# EAGLE board eeruler (EAGLE 6.6.0)

Size 200 x 32 mm. Coordinates in mm from the lower left corner, seen from the top.
Outline: 200,0 200,32 0,32 0,0 200,0
Copper layers 1: Top 0.035mm
Design rules "default *": minimum track width 5mil, minimum drill 0.25mm, track to track 0mil, track to pad 0mil, pad to pad 0mil, via to via 0mil, smd to smd 0mil, copper to edge 0mil, drill to drill 8mil, minimum pad ring 10mil, minimum via ring 8mil, stop-mask expansion 2mil, vias tented up to drill 0mil, thermal gap 10mil
Holes 0.4 mm at 1.5,6
Holes 0.5 mm at 1.5,8.1
Holes 0.6 mm at 1.5,10.2
Holes 0.7 mm at 1.5,12.3
Holes 0.8 mm at 1.5,14.4
Holes 0.9 mm at 1.5,16.5
Holes 1 mm at 1.5,18.6
Holes 1.1 mm at 1.5,20.6
Holes 1.2 mm at 1.5,22.8
Holes 1.3 mm at 1.5,24.9
Holes 1.4 mm at 1.5,27
Holes 1.5 mm at 197.5,5
Holes 1.8 mm at 197.5,14
Holes 1.7 mm at 197.5,11
Holes 1.6 mm at 197.5,8
Holes 1.9 mm at 197.5,17
Holes 2 mm at 197.5,20
Holes 2.2 mm at 197.5,23
Holes 3.2 mm at 197.5,26.5
Holes 0.3 mm at 1.5,4

## Footprints (pad centres in the part's own frame; a part is rotated, then mirrored left to right if it is on the bottom)
COPPER-0,15 = smd 6 x 0.15: P$1 3,0.3; P$2 3,0; P$3 3,-0.3
COPPER-0,2 = smd 6 x 0.2: P$1 3,0.4; P$2 3,0; P$3 3,-0.4
COPPER-0,3 = smd 6 x 0.3: P$1 3,0.6; P$2 3,0; P$3 3,-0.6
COPPER-0,4 = smd 6 x 0.4: P$1 3,0.8; P$2 3,0; P$3 3,-0.8
COPPER-0,5 = smd 6 x 0.5: P$1 3,1; P$2 3,0; P$3 3,-1
PINCOUNT-0,5 = smd 3 x 0.25: P$1 1.5,-4.125; P$2 1.5,-3.625; P$3 1.5,-3.125; P$4 1.5,-2.625; P$5 1.5,-2.125; P$6 1.5,-1.625; P$7 1.5,-1.125; P$8 1.5,-0.125; P$9 1.5,-0.625; P$10 1.5,-8.625; P$11 1.5,-8.125; P$12 1.5,-7.625; P$13 1.5,-7.125; P$14 1.5,-6.625; P$15 1.5,-6.125; P$16 1.5,-5.625; P$17 1.5,-4.625; P$18 1.5,-5.125; P$19 1.5,-9.125; P$20 1.5,-13.625; P$21 1.5,-13.125; P$22 1.5,-12.625; P$23 1.5,-12.125; P$24 1.5,-11.625; P$25 1.5,-11.125; P$26 1.5,-10.625; P$27 1.5,-9.625; P$28 1.5,-10.125; P$29 1.5,-14.125; P$30 1.5,-18.625; P$31 1.5,-18.125; P$32 1.5,-17.625; P$33 1.5,-17.125; P$34 1.5,-16.625; P$35 1.5,-16.125; P$36 1.5,-15.625; P$37 1.5,-14.625; P$38 1.5,-15.125; P$39 1.5,-19.125; P$40 1.5,-23.625; P$41 1.5,-23.125; P$42 1.5,-22.625; P$43 1.5,-22.125; P$44 1.5,-21.625; P$45 1.5,-21.125; P$46 1.5,-20.625; P$47 1.5,-19.625; P$48 1.5,-20.125; P$49 1.5,-24.125
PINCOUNT-0,635 = smd 3 x 0.318: P$1 1.5,-0.159; P$2 1.5,-0.794; P$3 1.5,-1.429; P$4 1.5,-2.064; P$5 1.5,-2.699; P$6 1.5,-3.334; P$7 1.5,-3.969; P$8 1.5,-4.604; P$9 1.5,-5.239; P$10 1.5,-5.874; P$11 1.5,-6.509; P$12 1.5,-7.144; P$13 1.5,-7.779; P$14 1.5,-8.414; P$15 1.5,-9.049; P$16 1.5,-9.684; P$17 1.5,-10.319; P$18 1.5,-10.954; P$19 1.5,-11.589; P$20 1.5,-12.224; P$21 1.5,-12.859; P$22 1.5,-13.494; P$23 1.5,-14.129; P$24 1.5,-14.764; P$25 1.5,-15.399; P$26 1.5,-16.034; P$27 1.5,-16.669; P$28 1.5,-17.304; P$29 1.5,-17.939; P$30 1.5,-18.574; P$31 1.5,-19.209; P$32 1.5,-19.844; P$33 1.5,-20.479; P$34 1.5,-21.114; P$35 1.5,-21.749; P$36 1.5,-22.384; P$37 1.5,-23.019
PACK-MSOP10 = smd 0.95 x 0.22: P$1 1.975,0; P$2 1.975,0.5; P$3 1.975,1; P$4 1.975,-0.5; P$5 1.975,-1; P$6 -1.975,-1; P$7 -1.975,0; P$8 -1.975,-0.5; P$9 -1.975,0.5; P$10 -1.975,1
PINCOUNT-0,8 = smd 3 x 0.4: P$1 1.5,-0.2; P$2 1.5,-1; P$3 1.5,-1.8; P$4 1.5,-2.6; P$5 1.5,-4.2; P$6 1.5,-3.4; P$7 1.5,-5; P$8 1.5,-5.8; P$9 1.5,-6.6; P$10 1.5,-7.4; P$11 1.5,-8.2; P$12 1.5,-9; P$13 1.5,-9.8; P$14 1.5,-10.6; P$15 1.5,-12.2; P$16 1.5,-11.4; P$17 1.5,-13; P$18 1.5,-13.8; P$19 1.5,-14.6; P$20 1.5,-15.4; P$21 1.5,-16.2; P$22 1.5,-17; P$23 1.5,-17.8; P$24 1.5,-18.6; P$25 1.5,-20.2; P$26 1.5,-19.4; P$27 1.5,-21; P$28 1.5,-21.8; P$29 1.5,-22.6
PINCOUNT-0,65 = smd 3 x 0.325: P$1 1.5,-0.163; P$2 1.5,-0.812; P$3 1.5,-1.462; P$4 1.5,-2.112; P$5 1.5,-2.763; P$6 1.5,-3.413; P$7 1.5,-4.062; P$8 1.5,-4.713; P$9 1.5,-5.362; P$10 1.5,-6.013; P$11 1.5,-6.662; P$12 1.5,-7.312; P$13 1.5,-7.963; P$14 1.5,-8.613; P$15 1.5,-9.262; P$16 1.5,-9.912; P$17 1.5,-10.562; P$18 1.5,-11.213; P$19 1.5,-11.863; P$20 1.5,-12.512; P$21 1.5,-13.162; P$22 1.5,-13.812; P$23 1.5,-14.463; P$24 1.5,-15.113; P$25 1.5,-15.762; P$26 1.5,-16.413; P$27 1.5,-17.062; P$28 1.5,-17.712; P$29 1.5,-18.363; P$30 1.5,-19.012; P$31 1.5,-19.663; P$32 1.5,-20.312; P$33 1.5,-20.962; P$34 1.5,-21.613; P$35 1.5,-22.262; P$36 1.5,-22.913; P$37 1.5,-23.562; P$38 1.5,-24.212; P$39 1.5,-24.863
COPPER-0,6 = smd 6 x 0.6: P$1 3,1.2; P$2 3,0; P$3 3,-1.2
COPPER-0,8 = smd 6 x 0.8: P$1 3,1.6; P$2 3,0; P$3 3,-1.6
COPPER-1,0 = smd 6 x 1: P$1 3,2; P$2 3,0; P$3 3,-2
COPPER-1,5 = smd 6 x 1.5: P$1 3,0; P$2 3,3; P$3 3,-3
PACK-SC70-6 = smd 0.22 x 0.34: P$1 0,-0.93; P$2 0.65,-0.93; P$3 -0.65,-0.93; P$4 0,0.93; P$5 -0.65,0.93; P$6 0.65,0.93
PACK-SOT23-3 = smd 0.42 x 0.5: P$1 0.95,-0.925; P$2 -0.95,-0.925; P$3 0,0.925
PACK-SOT23-6 = smd 0.4 x 0.45: P$1 -0.95,1.175; P$2 0,1.175; P$3 0.95,1.175; P$4 -0.95,-1.175; P$5 0,-1.175; P$6 0.95,-1.175
COPPER-0,1 = smd 6 x 0.1: P$1 3,0.2; P$2 3,0; P$3 3,-0.2
PACK-TO252 = smd 5.4 x 0.9: P$1 0,6.78
PACK-TO263 = smd 10 x 0.9: P$1 0,9.8 | smd 0.75 x 2.7: P$2 -2.54,-3.35; P$3 2.54,-3.35
PACK-DO214AA-SMB = smd 2.05 x 0.4: P$1 0,2.525; P$2 0,-2.525
PACK-DO214AB-SMC = smd 3 x 0.4: P$1 0,3.775; P$2 0,-3.775
PACK-DO214AC-SMA = smd 1.4 x 0.27: P$1 0,2.465; P$2 0,-2.465
PACK-MELF = smd 2.2 x 1.15: P$1 0,2.325; P$2 0,-2.325
PACK-MELF-MINI = smd 1.4 x 0.8: P$1 0,1.4; P$2 0,-1.4
PACK-MELF-MICRO = smd 1.1 x 0.4: P$1 0,0.9; P$2 0,-0.9
PACK-0201 = smd 0.15 x 0.3: P$1 -0.225,0; P$2 0.225,0
PACK-0402 = smd 0.25 x 0.5: P$1 -0.375,0; P$2 0.375,0
PACK-0603 = smd 0.3 x 0.8: P$1 -0.65,0; P$2 0.65,0
PACK-0805 = smd 0.4 x 1.25: P$1 0.8,0; P$2 -0.8,0
PACK-1206 = smd 0.5 x 1.6: P$1 -1.35,0; P$2 1.35,0
PACK-1210 = smd 0.5 x 2.5: P$1 -1.35,0; P$2 1.35,0
PACK-SOIC = smd 0.8 x 0.4: P$1 -4.75,-8.255; P$2 -4.75,-6.985; P$3 -4.75,-5.715; P$4 -4.75,-4.445; P$5 -4.75,-3.175; P$6 -4.75,-1.905; P$7 -4.75,-0.635; P$8 -4.75,0.635; P$9 -4.75,1.905; P$10 -4.75,3.175; P$11 -4.75,4.445; P$12 -4.75,5.715; P$13 -4.75,6.985; P$14 -4.75,8.255; P$15 4.75,-8.255; P$16 4.75,-6.985; P$17 4.75,-5.715; P$18 4.75,-4.445; P$19 4.75,-3.175; P$20 4.75,-1.905; P$21 4.75,-0.635; P$22 4.75,0.635; P$23 4.75,1.905; P$24 4.75,3.175; P$25 4.75,4.445; P$26 4.75,5.715; P$27 4.75,6.985; P$28 4.75,8.255; P$35 0.45,-0.635; P$36 0.45,0.635; P$37 0.45,1.905; P$38 0.45,3.175; P$39 0.45,4.445; P$40 0.45,5.715; P$41 0.45,6.985; P$42 0.45,8.255
PACK-SOD323 = smd 0.3 x 0.325: P$1 0,1.137; P$2 0,-1.137
PACK-SC79 = smd 0.3 x 0.1: P$1 0,0.75; P$2 0,-0.75
PACK-ECAP-4.3 = smd 0.65 x 0.5: P$1 0,2.5; P$2 0,-2.5
PACK-ECAP-5.3 = smd 0.65 x 0.5: P$1 0,3; P$2 0,-3
PACK-ECAP-6.6 = smd 0.65 x 0.5: P$1 0,3.65; P$2 0,-3.65
PACK-ECAP-8.3-E = smd 0.65 x 0.5: P$1 0,4.5; P$2 0,-4.5
PACK-ECAP-8.3-F = smd 0.9 x 0.6: P$1 0,4.6; P$2 0,-4.6
PACK-ECAP-10.3 = smd 0.9 x 0.6: P$1 0,5.6; P$2 0,-5.6
PACK-SSOP = smd 0.65 x 0.3: P$1 -3.575,3.575; P$2 -3.575,2.925; P$3 -3.575,2.275; P$4 -3.575,1.625; P$5 -3.575,0.975; P$6 -3.575,0.325; P$7 -3.575,4.225; P$8 -3.575,-0.325; P$9 -3.575,-0.325; P$10 -3.575,-0.975; P$11 -3.575,-1.625; P$12 -3.575,-2.275; P$13 -3.575,-2.925; P$14 -3.575,-3.575; P$15 -3.575,-4.225; P$16 3.575,-4.225; P$17 3.575,-3.575; P$18 3.575,-2.925; P$19 3.575,-2.275; P$20 3.575,-1.625; P$21 3.575,-0.975; P$22 3.575,-0.325; P$23 3.575,0.325; P$24 3.575,0.325; P$25 3.575,0.975; P$26 3.575,1.625; P$27 3.575,2.275; P$28 3.575,2.925; P$29 3.575,3.575; P$30 3.575,4.225
PACK-TSSOP = smd 0.5 x 0.25: P$1 -2.95,0.325; P$2 -2.95,0.975; P$3 -2.95,1.625; P$4 -2.95,2.275; P$5 -2.95,2.925; P$6 -2.95,3.575; P$7 -2.95,4.225; P$8 -2.95,-4.225; P$9 -2.95,-3.575; P$10 -2.95,-2.925; P$11 -2.95,-2.275; P$12 -2.95,-1.625; P$13 -2.95,-0.975; P$14 -2.95,-0.325; P$15 2.95,-0.325; P$16 2.95,-0.975; P$17 2.95,-1.625; P$18 2.95,-2.275; P$19 2.95,-2.925; P$20 2.95,-3.575; P$21 2.95,-4.225; P$22 2.95,4.225; P$23 2.95,3.575; P$24 2.95,2.925; P$25 2.95,2.275; P$26 2.95,1.625; P$27 2.95,0.975; P$28 2.95,0.325
PINCOUNT-0.4 = smd 3 x 0.2: P$1 1.5,-3.3; P$2 1.5,-2.9; P$3 1.5,-2.5; P$4 1.5,-2.1; P$5 1.5,-1.7; P$6 1.5,-1.3; P$7 1.5,-0.9; P$8 1.5,-0.5; P$9 1.5,-0.1; P$10 1.5,-3.7; P$11 1.5,-4.1; P$12 1.5,-4.5; P$13 1.5,-4.9; P$14 1.5,-5.3; P$15 1.5,-5.7; P$16 1.5,-6.1; P$17 1.5,-6.5; P$18 1.5,-6.9; P$19 1.5,-7.3; P$20 1.5,-7.7; P$21 1.5,-8.1; P$22 1.5,-8.5; P$23 1.5,-8.9; P$24 1.5,-9.3; P$25 1.5,-9.7; P$26 1.5,-10.1; P$27 1.5,-10.5; P$28 1.5,-10.9; P$29 1.5,-11.3; P$30 1.5,-11.7; P$31 1.5,-12.1; P$32 1.5,-12.5; P$33 1.5,-12.9; P$34 1.5,-13.3; P$35 1.5,-13.7; P$36 1.5,-14.1; P$37 1.5,-14.5; P$38 1.5,-14.9; P$39 1.5,-15.3; P$40 1.5,-15.7; P$41 1.5,-16.1; P$42 1.5,-16.5; P$43 1.5,-16.9; P$44 1.5,-17.3; P$45 1.5,-17.7; P$46 1.5,-18.1; P$47 1.5,-18.5; P$48 1.5,-18.9; P$49 1.5,-19.3
PACK-MSOP8 = smd 0.95 x 0.325: P$1 1.975,0.975; P$2 1.975,-0.975; P$3 1.975,-0.325; P$4 1.975,0.325; P$5 -1.975,-0.325; P$6 -1.975,-0.975; P$7 -1.975,0.975; P$8 -1.975,0.325
PACK-CRYSTAL-HC49-SMD = smd 0.4 x 0.8: P$1 6.1,0; P$2 -6.1,0
PACK-TQFP = smd 1 x 0.18: P$1 14.5,-0.8; P$2 14.5,-1.2; P$3 14.5,-1.6; P$4 14.5,-2; P$5 14.5,-2.4; P$6 14.5,-2.8; P$7 14.5,-3.2; P$8 14.5,-3.6; P$9 14.5,-4; P$10 14.5,-4.4; P$11 14.5,-4.8; P$12 14.5,-5.2; P$13 14.5,-5.6; P$14 14.5,-6; P$15 14.5,-6.4; P$16 14.5,-6.8; P$17 14.5,-7.2; P$18 14.5,-7.6; P$19 14.5,-8; P$20 14.5,-8.4; P$21 14.5,-8.8; P$22 14.5,-9.2; P$23 14.5,-9.6; P$24 14.5,-10; P$25 14.5,-10.4; P$26 14.5,-10.8; P$27 14.5,-11.2; P$28 14.5,-11.6; P$29 14.5,-12; P$30 14.5,-12.4; P$31 14.5,-12.8; P$32 14.5,-13.2; P$33 12.5,-1.2; P$34 12.5,-1.6; P$35 12.5,-2; P$36 12.5,-2.4; P$37 12.5,-2.8; P$38 12.5,-3.2; P$39 12.5,-3.6; P$40 12.5,-4; P$41 12.5,-4.4; P$42 12.5,-4.8; P$43 12.5,-5.2; P$44 12.5,-5.6; P$45 12.5,-6; P$46 12.5,-6.4; P$47 12.5,-6.8; P$48 12.5,-7.2; P$49 12.5,-7.6; P$50 12.5,-8; P$51 12.5,-8.4; P$52 12.5,-8.8; P$53 12.5,-9.2; P$54 12.5,-9.6; P$55 12.5,-10; P$56 12.5,-10.4; P$57 12.5,-10.8; P$58 10.5,-1.2; P$59 10.5,-1.6; P$60 10.5,-2; P$61 10.5,-2.4; P$62 10.5,-2.8; P$63 10.5,-3.2; P$64 10.5,-3.6; P$65 10.5,-4; P$66 10.5,-4.4; P$67 10.5,-4.8; P$68 10.5,-5.2; P$69 10.5,-5.6; P$70 10.5,-6; P$71 10.5,-6.4; P$72 10.5,-6.8; P$73 10.5,-7.2; P$74 10.5,-7.6; P$75 10.5,-8; P$76 10.5,-8.4; P$77 10.5,-8.8; P$78 7.5,-0.5; P$79 7.5,-0.9; P$80 7.5,-1.3; P$81 7.5,-1.7; P$82 7.5,-2.1; P$83 7.5,-2.5; P$84 7.5,-2.9; P$85 7.5,-3.3; P$86 7.5,-3.7; P$87 7.5,-4.1; P$88 7.5,-4.5; P$89 7.5,-4.9; P$90 7.5,-5.3; P$91 7.5,-5.7; P$92 7.5,-6.1; P$93 7.5,-6.5; P$94 5.5,-0.7; P$95 5.5,-1.1; P$96 5.5,-1.5; P$97 5.5,-1.9; P$98 5.5,-2.3; P$99 5.5,-2.7; P$100 5.5,-3.1; P$101 5.5,-3.5; P$102 5.5,-3.9; P$103 5.5,-4.3 | smd 0.22 x 1: P$104 13,-14.5; P$105 12.5,-14.5; P$106 12,-14.5; P$107 11.5,-14.5; P$108 11,-14.5; P$109 10.5,-14.5; P$110 10,-14.5; P$111 9.5,-14.5; P$112 9,-14.5; P$113 8.5,-14.5; P$114 8,-14.5; P$115 7.5,-14.5; P$116 7,-14.5; P$117 6.5,-14.5; P$118 6,-14.5; P$119 5.5,-14.5; P$120 5,-14.5; P$121 4.5,-14.5; P$122 4,-14.5; P$123 3.5,-14.5; P$124 3,-14.5; P$125 2.5,-14.5; P$126 2,-14.5; P$127 1.5,-14.5; P$128 1,-14.5; P$129 4.25,-5.5; P$130 3.75,-5.5; P$131 3.25,-5.5; P$132 2.75,-5.5; P$133 2.25,-5.5; P$134 1.75,-5.5; P$135 1.25,-5.5; P$136 0.75,-5.5; P$137 6.25,-7.5; P$138 5.75,-7.5; P$139 5.25,-7.5; P$140 4.75,-7.5; P$141 4.25,-7.5; P$142 3.75,-7.5; P$143 3.25,-7.5; P$144 2.75,-7.5; P$145 2.25,-7.5; P$146 1.75,-7.5; P$147 1.25,-7.5; P$148 0.75,-7.5; P$149 10.75,-12.5; P$150 10.25,-12.5; P$151 9.75,-12.5; P$152 9.25,-12.5; P$153 8.75,-12.5; P$154 8.25,-12.5; P$155 7.75,-12.5; P$156 7.25,-12.5; P$157 6.75,-12.5; P$158 6.25,-12.5; P$159 5.75,-12.5; P$160 5.25,-12.5; P$161 4.75,-12.5; P$162 4.25,-12.5; P$163 3.75,-12.5; P$164 3.25,-12.5; P$165 2.75,-12.5; P$166 2.25,-12.5; P$167 1.75,-12.5; P$168 1.25,-12.5; P$169 8.75,-10.5; P$170 8.25,-10.5; P$171 7.75,-10.5; P$172 7.25,-10.5; P$173 6.75,-10.5; P$174 6.25,-10.5; P$175 5.75,-10.5; P$176 5.25,-10.5; P$177 4.75,-10.5; P$178 4.25,-10.5; P$179 3.75,-10.5; P$180 3.25,-10.5; P$181 2.75,-10.5; P$182 2.25,-10.5; P$183 1.75,-10.5; P$184 1.25,-10.5

## Placement (x,y rotation side)
E$1  [COPPER-0,15]  10,24.25 0 top
E$2  [COPPER-0,2]  10,22.55 0 top
E$3  [COPPER-0,3]  10,20.6 0 top
E$4  [COPPER-0,4]  10,18 0 top
E$5  [COPPER-0,5]  10,14.8 0 top
E$6  [PINCOUNT-0,5]  158,6 90 top
E$7  [PINCOUNT-0,635]  158,12 90 top
E$8  [PACK-MSOP10]  65,26.5 0 top
E$9  [PINCOUNT-0,8]  158,24 90 top
E$10  [PINCOUNT-0,65]  158,18 90 top
E$11  [COPPER-0,6]  10,10.85 0 top
E$12  [COPPER-0,8]  10,6.15 0 top
E$13  [COPPER-1,0]  23.5,17 0 top
E$14  [COPPER-1,5]  23.5,9 0 top
E$15  [PACK-SC70-6]  77.5,26 180 top
E$16  [PACK-SOT23-3]  77.5,20 0 top
E$17  [PACK-SOT23-6]  77.5,23 0 top
E$18  [PACK-SOT89]  77.5,15.5 0 top
E$19  [PACK-SOT223]  77.5,9 0 top
E$20  [SILK-DIODE]  148.85,17.5 0 bottom
E$21  [COPPER-0,1]  10,26 0 top
E$22  [SILK-FONT]  142.9,26.6 270 bottom
E$23  [SILK-TABLE-SMDR]  194,27.1 0 bottom
E$24  [SILK-MFET-N-4]  152.6,13 0 bottom
E$25  [SILK-MFET-P-4]  152.6,22 0 bottom
E$26  [SILK-NPN-4]  145.6,13 0 bottom
E$27  [SILK-PNP-4]  145.6,22 0 bottom
E$28  [SILK-TABLE-VIA-ALL]  76.9,27.1 0 bottom
E$29  [SILK-TABLE-MM-MIL]  168.7,27.1 0 bottom
E$30  [SILK-TABLE-CURRENT-35-TRACE-IPC-2221A]  104.9,27.1 0 bottom
E$31  [PACK-TO252]  109,8.5 0 top
E$32  [PACK-TO263]  97,8 0 top
E$33  [PACK-DO214AA-SMB]  131,21 270 top
E$34  [PACK-DO214AB-SMC]  131,14.75 270 top
E$35  [PACK-DO214AC-SMA]  131,25.5 270 top
E$36  [PACK-MELF]  138,25.5 90 top
E$37  [PACK-MELF-MINI]  138,22.25 270 top
E$38  [PACK-MELF-MICRO]  138,19.75 270 top
E$39  [PACK-PLCC-4]  131,8 90 top
E$40  [PACK-PLCC-6]  138,9 90 top
E$41  [PACK-0201]  84,14.1 180 top
E$42  [PACK-0402]  84,12.95 180 top
E$43  [PACK-0603]  84,11.55 180 top
E$44  [PACK-0805]  84,9.9 180 top
E$45  [PACK-1206]  84,8 0 top
E$46  [PACK-1210]  84,5.5 0 top
E$47  [PACK-SOIC]  38,13 0 top
E$48  [PACK-QFN-32]  26.5,25.5 0 top
E$49  [PACK-SOD323]  138,17 90 top
E$50  [PACK-SC79]  138,14.5 90 top
E$51  [PACK-ECAP-4.3]  90,23 0 top
E$52  [PACK-ECAP-5.3]  96,23 0 top
E$53  [PACK-ECAP-6.6]  103,23 0 top
E$54  [PACK-ECAP-8.3-E]  111.5,22 0 top
E$55  [PACK-ECAP-8.3-F]  121,22 0 top
E$56  [PACK-ECAP-10.3]  121,10 0 top
E$57  [PACK-SSOP]  49,10 0 top
E$58  [PACK-TSSOP]  49,21 0 top
E$59  [PINCOUNT-0.4]  186,23 0 top
E$60  [PACK-MSOP8]  57,26.5 0 top
E$61  [SILK-TABLE-SPACING]  54.2,27.1 0 bottom
E$62  [PM-GHOSTD-5]  143.75,10 0 top
E$63  [SILK-RULER-1CM]  200,32 0 bottom
E$64  [SILK-WELECTRON]  31.3,0.7 0 bottom
E$65  [OSHW-3MM]  131,1.8 0 bottom
E$66  [SILK-TABLE-MTHREADING]  55.9,9.7 0 bottom
E$67  [PM-DROP-5]  96,24 0 top
E$69  [PM-CHERRY-5]  83,15 0 top
E$70  [SCHAF-7]  76.7,4.1 0 bottom
E$72  [PM-PILL-5]  70.5,24 0 top
E$73  [SILK-TABLE-E-ROW]  128.7,3.2 0 bottom
E$74  [SILKTABLE-AWG-MM]  31.2,27.1 0 bottom
E$75  [PM-DROP-5]  83,24 0 top
E$76  [HEADER-E-ROW-SMALL]  68.7,5.8 0 bottom
E$78  [PACK-QFN-16-4]  36.5,26 0 top
E$79  [PACK-QFN-16-3]  41,25.5 0 top
E$80  [LOGO-E2RULER]  68.9,6.5 0 bottom
E$81  [RULER-1CM]  0,32 0 top
E$82  [RULER-1CM]  10,32 0 top
E$83  [RULER-1INCH]  0,0 0 top
E$84  [RULER-1INCH]  25.4,0 0 top
E$85  [RULER-1INCH]  50.8,0 0 top
E$86  [RULER-1INCH]  76.2,0 0 top
E$87  [RULER-1INCH]  101.6,0 0 top
E$88  [RULER-1CM]  20,32 0 top
E$89  [RULER-1CM]  30,32 0 top
E$90  [RULER-1CM]  40,32 0 top
E$91  [RULER-1CM]  50,32 0 top
E$92  [RULER-1CM]  60,32 0 top
E$93  [RULER-1CM]  70,32 0 top
E$94  [RULER-1CM]  80,32 0 top
E$95  [RULER-1CM]  90,32 0 top
E$96  [RULER-1CM]  100,32 0 top
E$97  [RULER-1CM]  110,32 0 top
E$98  [RULER-1INCH]  127,0 0 top
E$99  [RULER-1INCH]  152.4,0 0 top
E$100  [RULER-1INCH7/8]  177.8,0 0 top
E$101  [PACK-CRYSTAL-3.2-2.5]  152.5,20.5 180 top
E$102  [PACK-CRYSTAL-5.0-3.2]  152.5,14.75 0 top
E$103  [RULER-1CM]  120,32 0 top
E$104  [RULER-1CM]  130,32 0 top
E$105  [RULER-1CM]  140,32 0 top
E$106  [RULER-1CM]  150,32 0 top
E$107  [RULER-1CM]  160,32 0 top
E$108  [RULER-1CM]  170,32 0 top
E$109  [RULER-1CM]  180,32 0 top
E$110  [RULER-1CM]  190,32 0 top
E$111  [PACK-CRYSTAL-HC49-SMD]  149,7.5 0 top
E$112  [PACK-CRYSTAL-2.5-2.0]  152.4,25.5 0 top
E$114  [PACK-TQFP]  57.75,19.5 0 top
E$118  [SILK-RULER-1CM]  190,32 0 bottom
E$119  [SILK-RULER-1CM]  180,32 0 bottom
E$120  [SILK-RULER-1CM]  170,32 0 bottom
E$121  [SILK-RULER-1CM]  160,32 0 bottom
E$122  [SILK-RULER-1CM]  150,32 0 bottom
E$123  [SILK-RULER-1CM]  140,32 0 bottom
E$124  [SILK-RULER-1CM]  130,32 0 bottom
E$125  [SILK-RULER-1CM]  120,32 0 bottom
E$126  [SILK-RULER-1CM]  110,32 0 bottom
E$127  [SILK-RULER-1CM]  100,32 0 bottom
E$128  [SILK-RULER-1CM]  90,32 0 bottom
E$129  [SILK-RULER-1CM]  80,32 0 bottom
E$130  [SILK-RULER-1CM]  70,32 0 bottom
E$131  [SILK-RULER-1CM]  60,32 0 bottom
E$132  [SILK-RULER-1CM]  50,32 0 bottom
E$133  [SILK-RULER-1CM]  40,32 0 bottom
E$134  [SILK-RULER-1CM]  30,32 0 bottom
E$135  [SILK-RULER-1CM]  20,32 0 bottom
E$136  [SILK-RULER-1CM]  10,32 0 bottom
E$137  [SILK-RULER-50/100MIL]  10,1.5 90 bottom
E$138  [SILK-RULER-1.25/2.5MM]  4,1.5 90 bottom
E$139  [SILK-TABLE-ECAP]  132.7,27.1 0 bottom

## Library data of the parts
E$1-E$61 E$63-E$66 E$73 E$74 E$76 E$78-E$112 E$114 E$118-E$139 = ucruler
E$62 E$67 E$69 E$70 E$72 E$75 = grafiken

## Text on the board
tPlace: 1 | 2 | 3 | 4 | 5 | 6 | 7 | 8 | 9 | 10 | 11 | 12 | 13 | 14 | 15 | 16 | 17 | 18 | 19 | 1.4mm | 0.1mm | 5x5 | 4x4 | 3x3 | SC70 | SMA | MELF | 3.2mm | 1.3mm | 0.15mm | MSOP8 | MSOP10 | 2.5x2.0 | 0.8mm | 0.4mm | 1.2mm | 0.2mm | QFN-16 | SOT23-6 | B | C | D(8) | 2.2mm | QFN-32 | E | F | SMB | MiniMELF / SOD80 | 1.1mm | 0.3mm | TSSOP | SOT23 | MicroMELF | 2.0mm | 1.0mm | 0.4mm | 3.2x2.5 | 0.65mm | 1mm | SMC | SOD323 / SC76 | 1.9mm | 0.9mm | 0.5mm | 0.8mm | 0201 | SC79 | 1.8mm | SOIC-N/W | SOT89 | 0.7mm | 0402 | 5.0x3.2 | 0.6mm | 0603 | 1.7mm | 0.6mm | SSOP | G | 0.635mm | 1.5mm | SOT223 | 0805 | 0.5mm | 1.6mm | 1206 | HC49 | 0.4mm | 0.8mm | TO-263/D2PAK | PLCC-4 | PLCC-6 | 1210 | TO-252/DPAK | 1.5mm | 0.3mm | 0.5mm | 1 | 2 | 3 | 4 | 5 | 6 | 7
bPlace: 19 | 18 | 17 | 16 | 15 | 14 | 13 | 12 | 11 | 10 | 10 | 9 | 8 | 7 | 6 | 5 | 4 | 3 | 2 | 1 | 50/100mil 1.25/2.5mm | P-Type | U | DD | CMOS NOT | U | SS | units default to SI/mm | N-Type | https://github.com/maugsburger/eeruler | c | rev / 2016 | Owner